# Altium PCB Copy of PCB2.PcbDoc
Units mm, origin at the board's own origin, x right, y up, seen from the top; angles counter-clockwise.
Board outline 52.07 x 41.66 mm, 2 copper layers (Top Layer, Bottom Layer); 10 components, 19 nets, 38 pads, 0 vias.
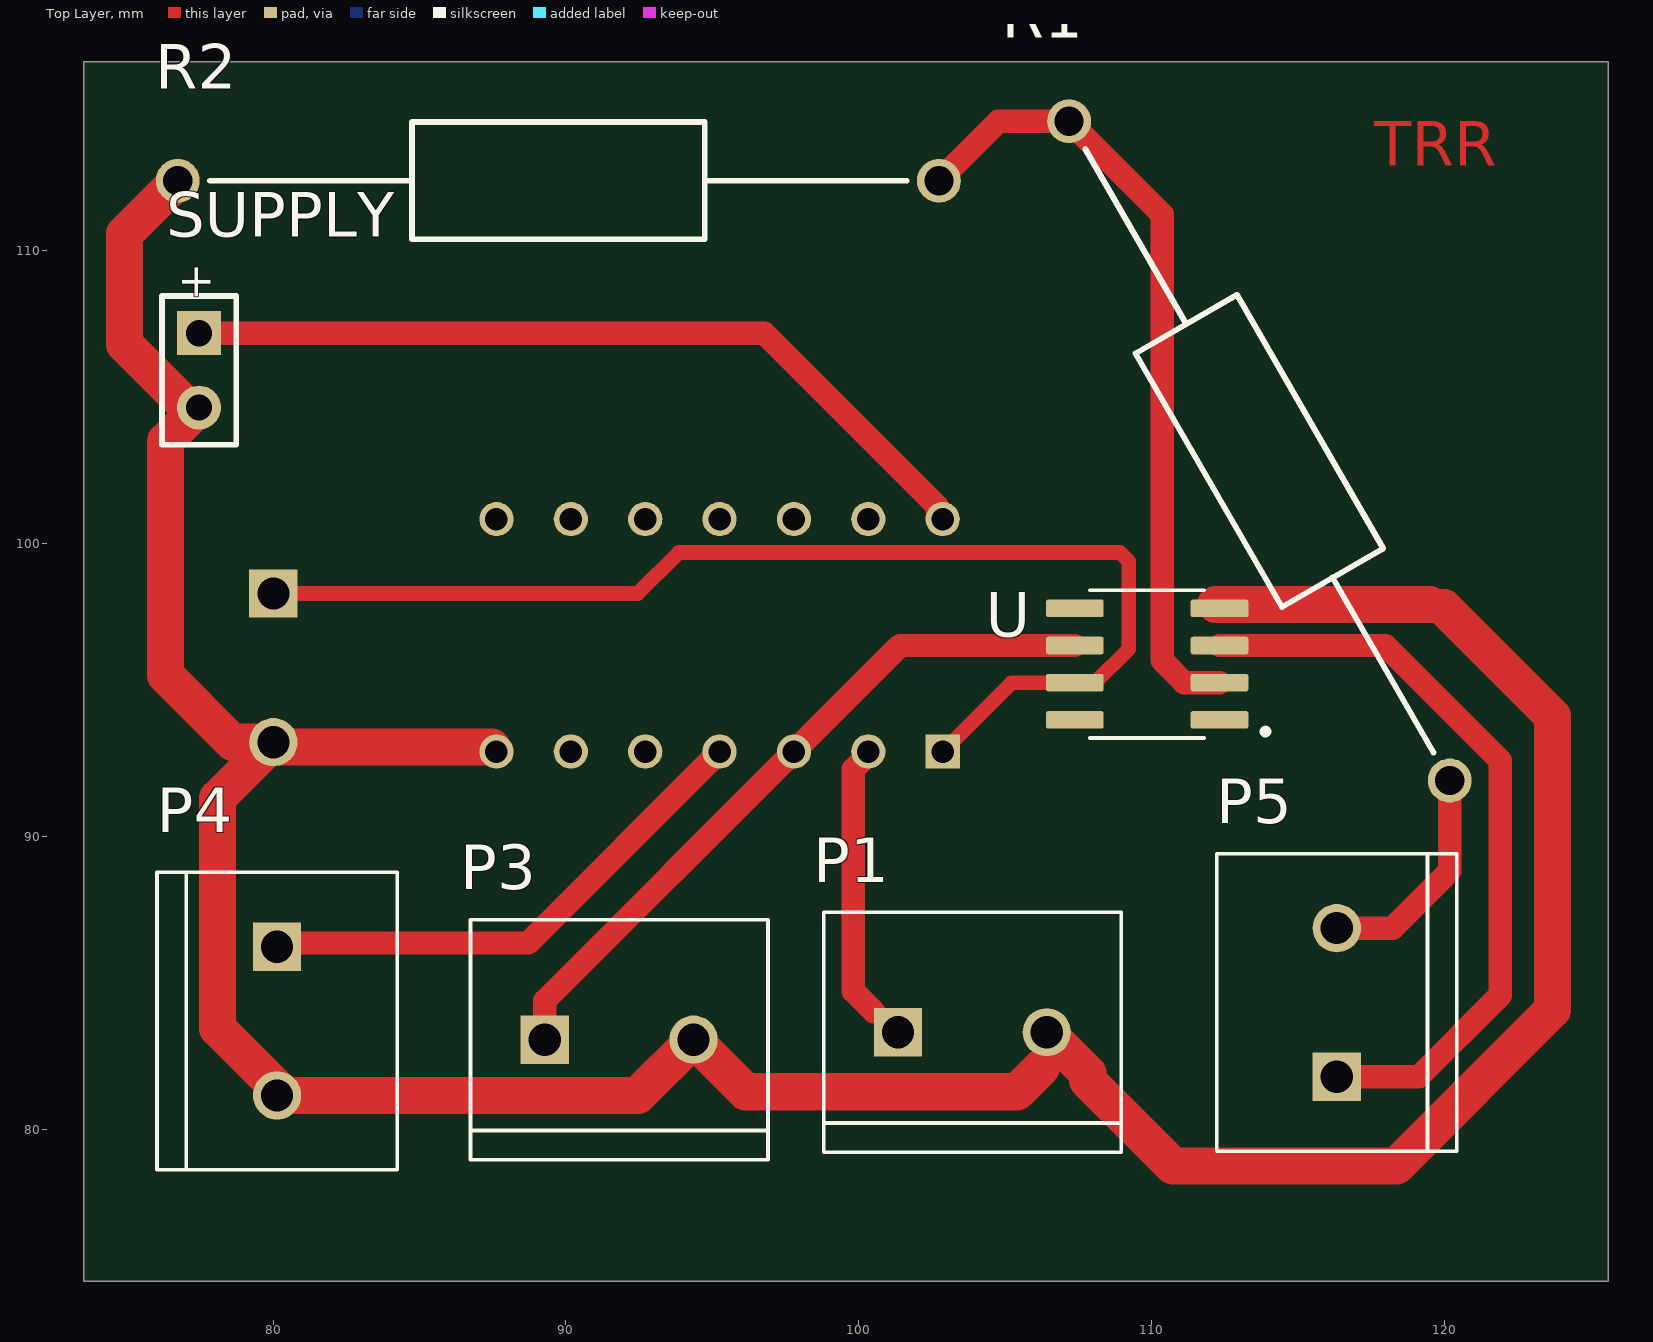
[diagram p0: Top Layer view]
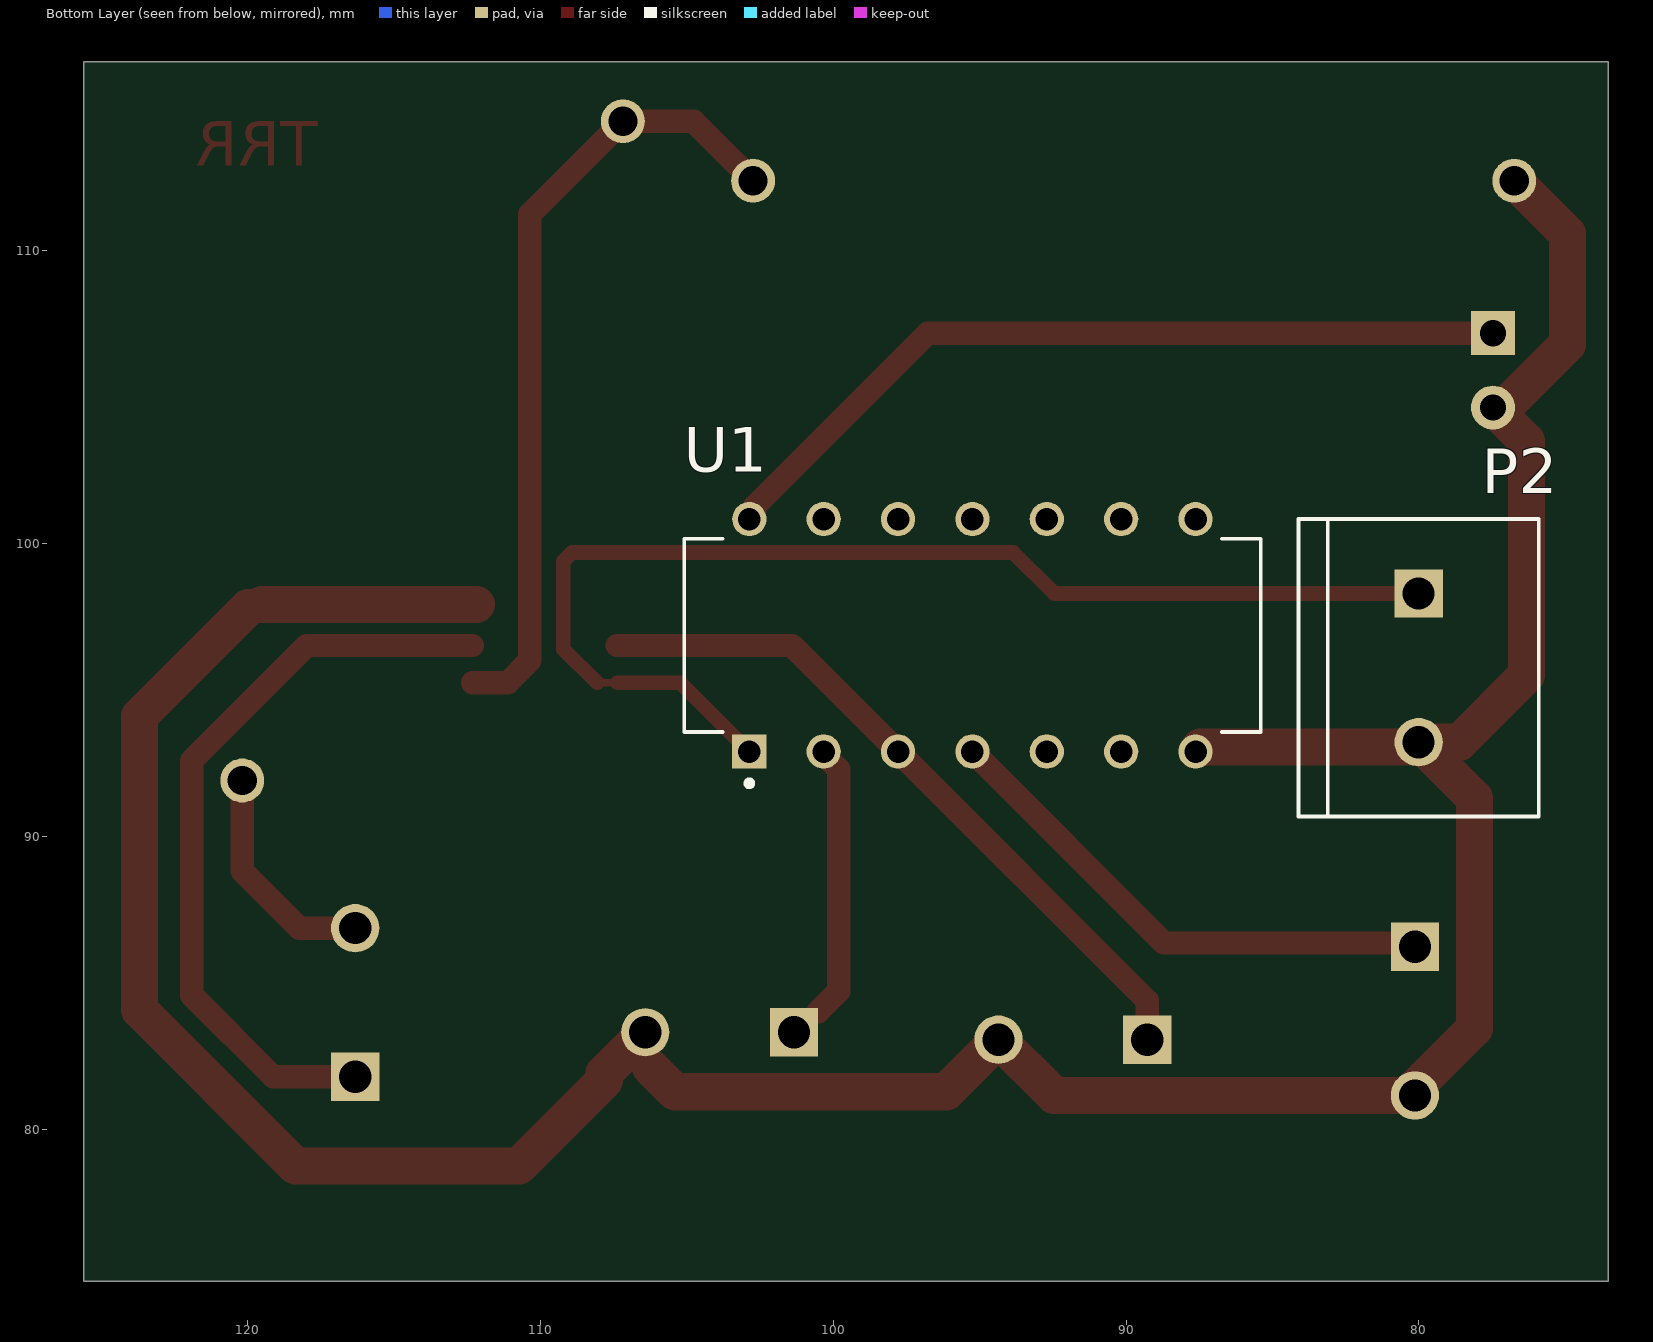
[diagram p1: Bottom Layer view, seen from below]

## Layer stack, top to bottom
Top Solder: solder mask 0.0102, Solder Resist, Dk 3.5
Top Layer: signal copper 0.0356
Dielectric 1: dielectric 0.32, FR-4, Dk 4.8
Bottom Layer: signal copper 0.0356
Bottom Solder: solder mask 0.0102, Solder Resist, Dk 3.5

## Board outline
73.533,74.803 125.603,74.803 125.603,116.459 73.533,116.459

## Design rules (kind name [scope] priority, off if disabled: settings)
Clearance [All] p1: gap=0.254 ignorepadtopadclearanceinfootprint=FALSE except(0: Arc-Hole Track-Hole SMDPad-Hole THPad-Hole Via-Hole Fill-Hole Poly-Hole Region-Hole Text-Hole)
PolygonConnect [All] p1: connectstyle=Relief reliefconductorwidth=0.254 reliefentries=4 polygonreliefangle="90 Angle" airgapwidth=0.254
RoomDefinition Shutdown_ckt [InComponentClass('Shutdown_ckt')] p1: confinementstyle=ConfineIn formatcopy=TRUE lockcomponents=FALSE outline 180.721,33.02 293.878,33.02 293.878,64.008 180.721,64.008
RoutingVias [All] p1: holewidth=0.711 width=1.27 viastyle="Through Hole" minholewidth=0.711 minwidth=1.27 maxholewidth=0.711 maxwidth=1.27
SolderMaskExpansion [All] p1: expansion=0.102 istentingtop=FALSE
Width [All] p1: maxlimit=0.254 minlimit=0.254 preferedwidth=0.254
30 further rules are at their usual default settings.

## Classes and differential pairs
component class Shutdown_ckt: P1 P3 P4 P5 R2 SUPPLY

## Components (designator, comment, footprint, x,y, rotation, side; value= is the part's Value field where it differs from the comment)
P1 "282837-2" TE_282837-2 103.886,83.312 r0 top
P2 "282837-2" TE_282837-2 80.01,95.758 r270 bottom
P3 "282837-2" TE_282837-2 91.821,83.058 r0 top
P4 "282837-2" TE_282837-2 80.137,83.693 r270 top
P5 "282837-2" TE_282837-2 116.332,84.328 r90 top
R1 "EMC2-47RKI" RESAD2600W80L1000D400 120.188,91.91 r120 top
R2 "EMC2-47RKI" RESAD2600W80L1000D400 76.743,112.395 r0 top
SUPPLY "Battery" BAT-2 77.47,105.918 r270 top
U "UA741CD" SOIC127P599X175-8N 109.855,95.885 r180 top
U1 "SN7404N" DIP794W45P254L1969H508Q14 95.25,96.868 r90 bottom

## Footprints (in the part's own frame and the unit in brackets; to place one, negate y for a bottom-side part, rotate by r counter-clockwise, add the part's x,y. Pads: shape width x height; smd on the part's side, far side on the other; paste and mask are expansions set on the pad)
BAT-2 [mm] "Battery; 2 Leads"
  rect 1.5x1.5 hole 0.9: 1(-1.27,0)
  round 1.5 hole 0.9: 2(1.27,0)
  silkscreen extent -2.54,-1.27 2.54,1.27
DIP794W45P254L1969H508Q14 [mm]
  rect 1.17x1.17 / inner round 1.17 / far side rect 1.17x1.17 hole 0.77: 1(-3.97,7.62)
  round 1.17 hole 0.77: 2(-3.97,5.08) 3(-3.97,2.54) 4(-3.97,0) 5(-3.97,-2.54) 6(-3.97,-5.08) 7(-3.97,-7.62) 8(3.97,-7.62) 9(3.97,-5.08) 10(3.97,-2.54) 11(3.97,0) 12(3.97,2.54) 13(3.97,5.08) 14(3.97,7.62)
  silkscreen extent -5.15,-9.84 3.3,9.84, body extent -4.1,-9.65 4.1,9.65, height 5.08
RESAD2600W80L1000D400 [mm]
  round 1.5 hole 1: 1(0,0) 2(26,0)
  silkscreen extent 1.1,-2 24.9,2
SOIC127P599X175-8N [mm]
  rrect25% 1.97x0.6 smd: 1(-2.47,1.905) 2(-2.47,0.635) 3(-2.47,-0.635) 4(-2.47,-1.905) 5(2.47,-1.905) 6(2.47,-0.635) 7(2.47,0.635) 8(2.47,1.905)
  silkscreen extent -4.14,-2.52 1.95,2.52
TE_282837-2 [mm]
  rect 1.65x1.65 / inner round 1.65 / far side rect 1.65x1.65 hole 1.1: 1(-2.54,0)
  round 1.65 hole 1.1: 2(2.54,0)
  silkscreen extent -5.08,-4.1 5.08,4.1, body extent -5.68,-4.1 5.08,4.1, height 10

## Part data
P1 P2 P3 P4 P5: "Ð Ð°Ð·ÑŠÐµÐ¼Ð½Ñ‹Ðµ ÐºÐ»ÐµÐ¼Ð¼Ð½Ñ‹Ðµ ÐºÐ¾Ð»Ð¾Ð´ÐºÐ¸ Ð Ð¾Ð·ÐµÑ‚ÐºÐ° 2 Ð¿Ð¾Ð»Ð¾Ð¶ÐµÐ½Ð¸Ñ 5,08 Ð¼Ð¼ ÐŸÑ€Ð¸Ð¿Ð¾Ð¹ Ð¿Ñ€ÑÐ¼Ð¾Ð¹ Ñ‡ÐµÑ€ÐµÐ· Ð¾Ñ‚Ð²ÐµÑ€ÑÑ‚Ð¸Ðµ 13,5 Ð / ÐºÐ¾Ð½Ñ‚Ð°ÐºÑ‚", Package=None, Availability="In Stock", Check_prices=https://www.snapeda.com/parts/282837-2/TE+Connectivity+AMP+Connectors/view-part/?ref=eda, MF="TE Connectivity", MP=282837-2, Price=None, Purchase-URL=https://pricing.snapeda.com/search/part/282837-2/?ref=eda, SnapEDA_Link=https://www.snapeda.com/parts/282837-2/TE+Connectivity+AMP+Connectors/view-part/?ref=snap
R1 R2: "RES 47 OHM 2W 10% AXIAL", Package=None, Check_prices=https://www.snapeda.com/parts/EMC2-47RKI/TT+Electronics%252FWelwyn/view-part/?ref=eda, MF="TT Electronics/Welwyn", MP=EMC2-47RKI, SnapEDA_Link=https://www.snapeda.com/parts/EMC2-47RKI/TT+Electronics%252FWelwyn/view-part/?ref=snap
SUPPLY: "Multicell Battery", LatestRevisionDate=17-Jul-2002, LatestRevisionNote="Re-released for DXP Platform.", PackageDescription="Battery; 2 Leads", PackageReference=BAT-2, Published=24-Mar-1999, Publisher="Altium Limited"
U: "General-Purpose Operational Amplifier 8-SOIC 0 to 70", Package="SOIC-8 Texas Instruments", Availability=Good, Check_prices=OPAMP, DigiKey-Purchase-URL=https://snapeda.com/shop?store=DigiKey&id=11613, MF="Texas Instruments", Mouser-Purchase-URL=https://snapeda.com/shop?store=Mouser&id=11613, MP=UA741CD, Price=None, SnapEDA_Link=https://www.snapeda.com/parts/UA741CD/Texas%20Instruments/view-part/11613/?ref=snap, Texas_Instruments-Purchase-URL=https://snapeda.com/shop?store=Texas+Instruments&id=11613
U1: "6-ch, 4.75-V to 5.25-V bipolar inverters", Package="PDIP-14 Texas Instruments", Availability="In Stock", Check_prices=https://www.snapeda.com/parts/SN7404N/Texas+Instruments/view-part/?ref=eda, MF="Texas Instruments", MP=SN7404N, Price=None, Purchase-URL=https://pricing.snapeda.com/search/part/SN7404N/?ref=eda, SnapEDA_Link=https://www.snapeda.com/parts/SN7404N/Texas+Instruments/view-part/?ref=snap

## Nets (pads, with @x,y where several pads share a name; then routed paths per layer and width w, separated by ;. In a path a pad name is that pad's centre, name@x,y a point inside that pad or via, vN(x,y) a via of type N, cw(c..) or ccw(c..) an arc to the next point about the centre after c; other vN are vias at no path point)
GND: P1.2 P2.2 P3.2 P4.2 R2.1 SUPPLY.2 U1.7 U.4 | length 119.1
  Top Layer w0.254: P2.2 P2.2@80.17,93.058 ; P4.2 P4.2@80.137,81.407 ; U1.7@87.47,93.058 U1.7 ; 106.236,82.106 106.236,83.122 P1.2 ; 107.823,81.407 107.823,81.915
  Top Layer w1.27: R2.1 74.93,110.582 74.93,106.807 77.045,104.692 77.426,104.692 SUPPLY.2 76.327,103.505 76.327,95.504 78.613,93.218 P2.2 78.105,91.313 78.105,83.439 P4.2@80.137,81.407 ; P4.2 92.456,81.153 P3.2 96.139,81.28 105.41,81.28 106.236,82.106 ; P2.2@80.17,93.058 U1.7@87.47,93.058 ; P1.2 107.823,81.915 ; 107.823,81.661 110.744,78.74 118.364,78.74 123.698,84.074 123.698,94.107 119.986,97.819 ; U.4@112.198,97.917 119.507,97.917
NetP1_1: P1.1 U1.2 | length 10.5
  Top Layer w0.254: P1.1@100.521,84.01 100.648,84.01 P1.1
  Top Layer w0.8: U1.2 100.33,92.798 99.822,92.29 99.822,84.709 P1.1@100.521,84.01
NetP2_1: P2.1 U1.1 U.7 | length 40.7
  Top Layer w0.254: U.7 U.7@108.07,95.25
  Top Layer w0.5: P2.1 92.456,98.298 93.853,99.695 108.927,99.695 109.22,99.402 109.22,96.4 U.7@108.07,95.25 ; U1.1 105.222,95.25 U.7
NetP3_1: P3.1 U1.3 U.6 | length 24.5
  Top Layer w0.8: P3.1 89.281,84.389 U1.3 101.412,96.52 U.6
NetP4_1: P4.1 U1.4 | length 17.9
  Top Layer w0.254: P4.1 P4.1@80.264,86.36
  Top Layer w0.8: P4.1@80.264,86.36 88.712,86.36 U1.4
NetP5_1: P5.1 U.3 | length 26
  Top Layer w0.8: U.3 117.983,96.52 121.92,92.583 121.92,84.582 119.126,81.788 P5.1
NetP5_2: P5.2 R1.1 | length 7.8
  Top Layer w0.8: P5.2 117.907,86.868 118.237,86.868 120.188,88.819 R1.1
NetR1_2: R1.2 R2.2 U.2 | length 27.3
  Top Layer w0.8: R2.2 104.775,114.427 R1.2 110.363,111.252 110.363,96.012 111.125,95.25 U.2
NetSUPPLY_1: SUPPLY.1 U1.14 | length 28.2
  Top Layer w0.8: SUPPLY.1 96.774,107.188 102.685,101.277 102.685,101.123 102.87,100.938 U1.14
NetU1_5: U1.5
NetU1_6: U1.6
NetU1_8: U1.8
NetU1_9: U1.9
NetU1_10: U1.10
NetU1_11: U1.11
NetU1_12: U1.12
NetU1_13: U1.13
NetU_1: U.1
NetU_5: U.5
pads on no net: U.8

## Other copper
Top Layer:
  text "TRR" at 117.602,112.903 h1.52

## Text inside footprints (layer, text, board x,y; h text height)
SUPPLY: Top Overlay "+" at 76.893,109.588 h1.15 r270